# Altium PCB plata_nizhn.PcbDoc
Units mm, origin at the board's own origin, x right, y up, seen from the top; angles counter-clockwise.
Board outline 100 x 25 mm, 2 copper layers (Top Layer, Bottom Layer); 9 components, 13 nets, 27 pads, 0 vias.
Unrouted connection lines stored in the file: 1.
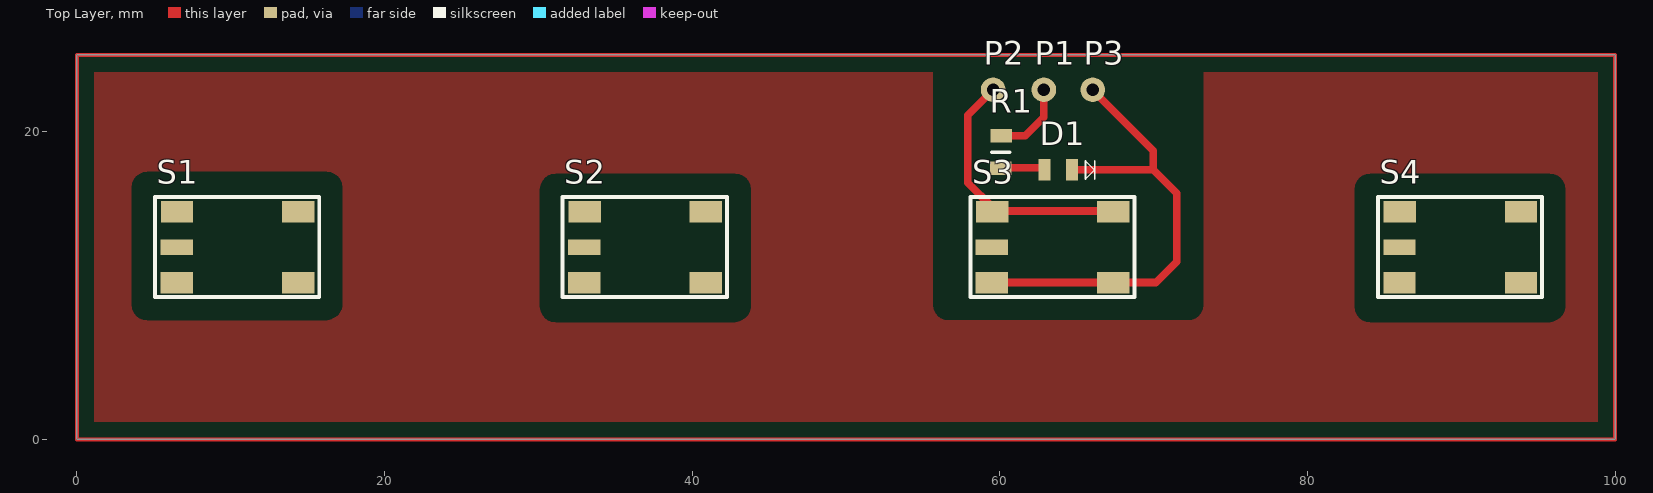
[diagram p0: Top Layer view]
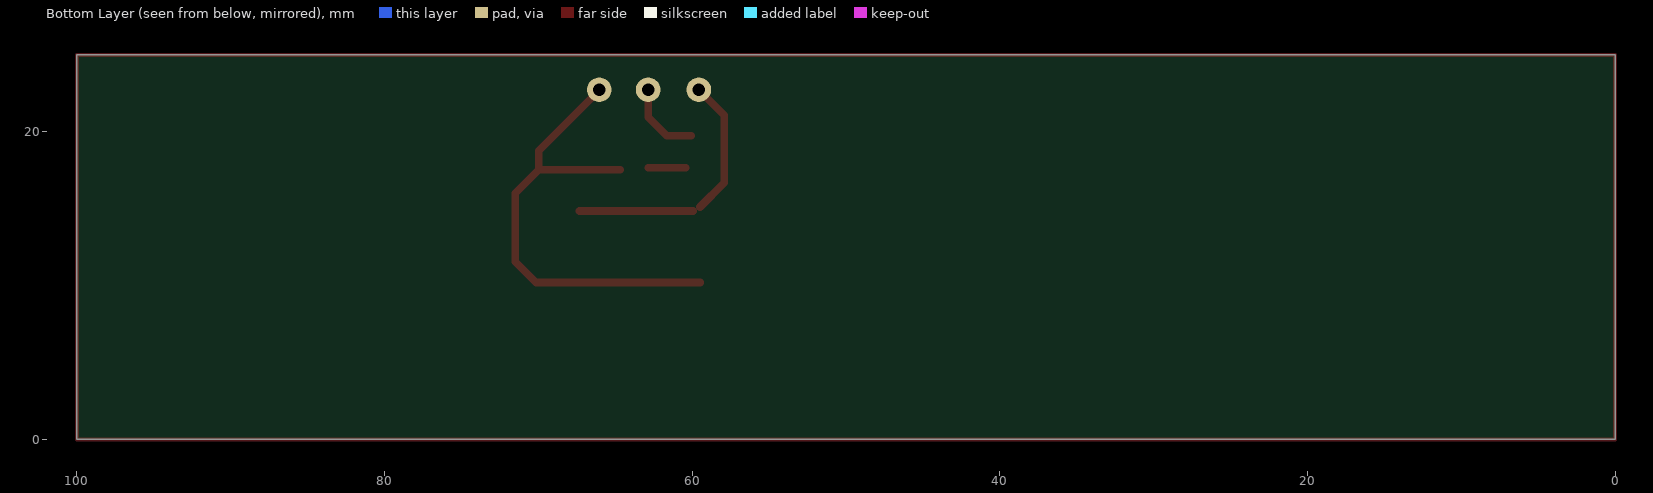
[diagram p1: Bottom Layer view, seen from below]

## Layer stack, top to bottom
Top Solder: solder mask 0.0102, Solder Resist, Dk 3.5
Top Layer: signal copper 0.0356
Dielectric 1: dielectric 0.32, FR-4, Dk 4.8
Bottom Layer: signal copper 0.0356
Bottom Solder: solder mask 0.0102, Solder Resist, Dk 3.5

## Board outline
0,0 100,0 100,25 0,25

## Design rules (kind name [scope] priority, off if disabled: settings)
Clearance [All] p1: gap=1
PlaneConnect [All] p1: planeconnectstyle=Relief reliefexpansion=0.1 reliefentries=4 reliefconductorwidth=0.5 reliefairgap=1
PolygonConnect [All] p1: connectstyle=Relief reliefconductorwidth=0.5 reliefentries=4 polygonreliefangle="90 Angle" airgapwidth=1
RoutingVias [All] p1: holewidth=0.711 width=1.27 viastyle="Through Hole" minholewidth=0.711 minwidth=1.27 maxholewidth=0.711 maxwidth=1.27
SolderMaskExpansion [All] p1: expansion=0.102
Width [All] p1: maxlimit=0.5 minlimit=0.3 preferedwidth=0.5
28 further rules are at their usual default settings.

## Components (designator, comment, footprint, x,y, rotation, side; value= is the part's Value field where it differs from the comment)
D1 "LED0" LED0805 63.119,17.526 r0 top
P1 "2.14 pad" PAD 62.865,22.733 r0 top
P2 "2.14 pad" PAD 59.563,22.733 r0 top
P3 "2.14 pad" PAD 66.04,22.733 r0 top
R1 "250" 6-0805_N 60.071,18.669 r90 top
S1 "B" STMW 10.42,12.5 r0 top
S2 "C" STMW 36.92,12.5 r0 top
S3 "E" ? 63.42,12.5 r0 top
S4 "M" STMW 89.92,12.5 r0 top

## Footprints (in the part's own frame and the unit in brackets; to place one, negate y for a bottom-side part, rotate by r counter-clockwise, add the part's x,y. Pads: shape width x height; smd on the part's side, far side on the other; paste and mask are expansions set on the pad)
6-0805_N [mm] "Chip Resistor, Body 2.0x1.2mm, IPC Medium Density"
  rect 0.9x1.4 smd: 1(-1.039,0.009) 2(1.078,-0.007)
  silkscreen extent 0,-0.6 0,0.6, body extent -1.07,-0.7 1.07,0.7, height 0.7
LED0805 [mm] "Chip Resistor, Body 2.0x1.2mm, IPC High Density"
  rect 0.8x1.4 smd: 1(-0.219,0.008) 2(1.578,0.008)
  silkscreen extent 2.45,-0.6 3.05,0.57, body extent -0.43,-0.72 1.78,0.72, height 1.4
PAD [mm]
  round 1.6 hole 0.8: 1(0,0)
STMW [mm]
  rect 2.1x1 smd: 0(-3.938,0)
  rect 2.1x1.4 smd: 1(-3.912,2.3) 1(3.962,2.3) 2(-3.938,-2.3) 2(3.962,-2.3)
  silkscreen extent -5.34,-3.25 5.34,3.25
? [mm]
  rect 2.1x1 smd: 1(-3.938,0)
  rect 2.1x1.4 smd: 1(-3.912,2.3) 1(3.962,2.3) 2(-3.938,-2.3) 2(3.962,-2.3)
  silkscreen extent -5.34,-3.25 5.34,3.25

## Part data
D1: "Typical INFRARED GaAs LED"
P1 P2 P3: "pad"
R1: library part Res2, "Resistor"
S1 S2 S3 S4: library part STMW, "Switch"

## Nets (pads, with @x,y where several pads share a name; then routed paths per layer and width w, separated by ;. In a path a pad name is that pad's centre, name@x,y a point inside that pad or via, vN(x,y) a via of type N, cw(c..) or ccw(c..) an arc to the next point about the centre after c; other vN are vias at no path point)
A1: 
A2: 
A3: 
A4: 
GND: 
LED1: 
LED2: 
LED3: 
LED4: 
NetD1_1: D1.1 R1.1 | length 2.5
  Top Layer w0.5: R1.1@60.412,17.661 D1.1@62.865,17.661
NetD1_2: D1.2 P3.1 S3.2 | length 31.3
  Top Layer w0.5: S3.2@59.482,10.2 67.382,10.2 70.144,10.2 71.501,11.557 71.501,16.002 69.977,17.526 ; D1.2@64.697,17.526 69.977,17.526 ; P3.1@66,22.733 69.977,18.756 69.977,17.526
NetP1_1: P1.1 R1.2 | length 5.1
  Top Layer w0.5: R1.2 61.657,19.747 62.865,20.955 P1.1
NetP2_1: P2.1 S3.1 | length 16.3
  Top Layer w0.5: S3.1@59.492,15.109 57.912,16.689 57.912,21.082 P2.1 ; S3.1@59.944,14.855 S3.1@67.327,14.855
pads on no net: S1.0 S1.1 S1.2 S2.0 S2.1 S2.2 S4.0 S4.1 S4.2
copper on no net: | length 250
  Top Layer w0.254: 0,0 0,25 100,25 100,0 0,0

## Polygon pours and split planes (outlines as drawn)
NetD1_2 on Top Layer "Bottom Layer-No Net" (solid, pour order 11): 0,25 100,25 100,0 0,0